# Altium PCB PCBPadometer.PcbDoc
Units mm, origin at the board's own origin, x right, y up, seen from the top; angles counter-clockwise.
Board outline 47.04 x 33.14 mm, 2 copper layers (Top Layer, Bottom Layer); 22 components, 20 nets, 131 pads, 15 vias.
Unrouted connection lines stored in the file: 1.
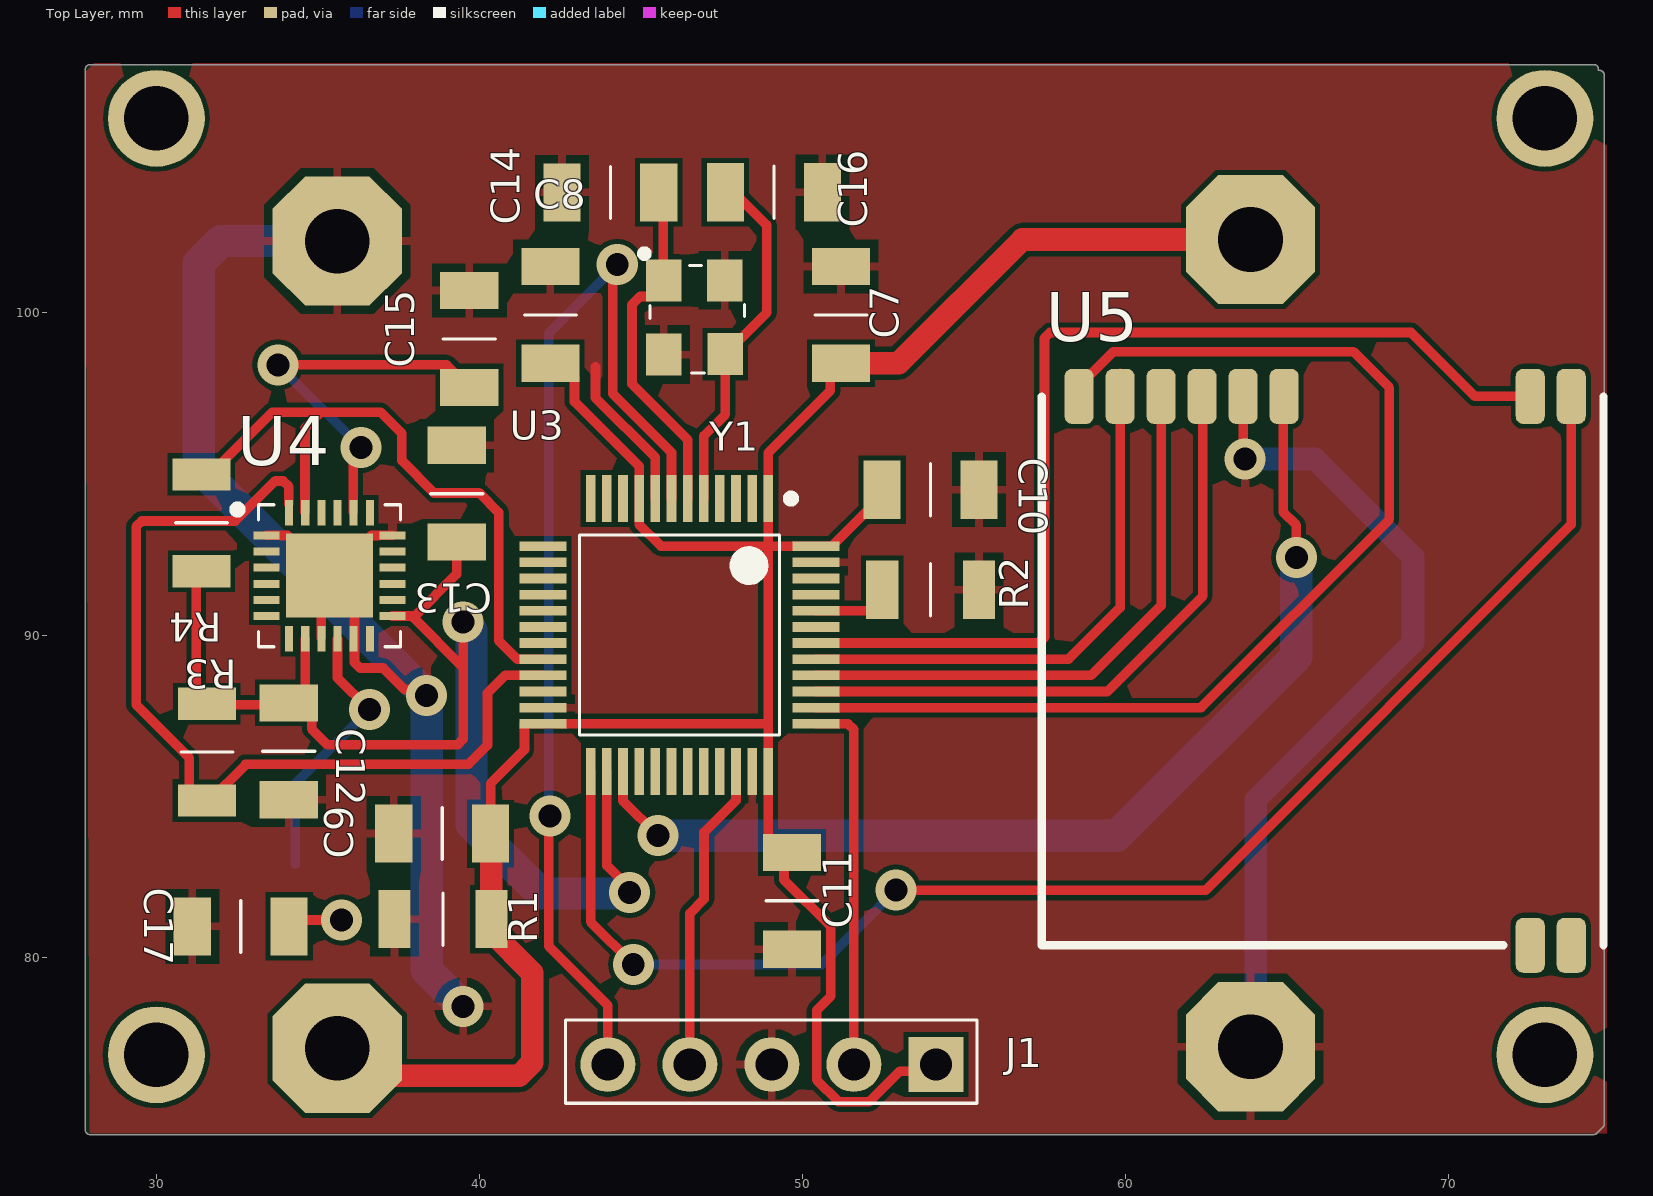
[diagram p0: Top Layer view]
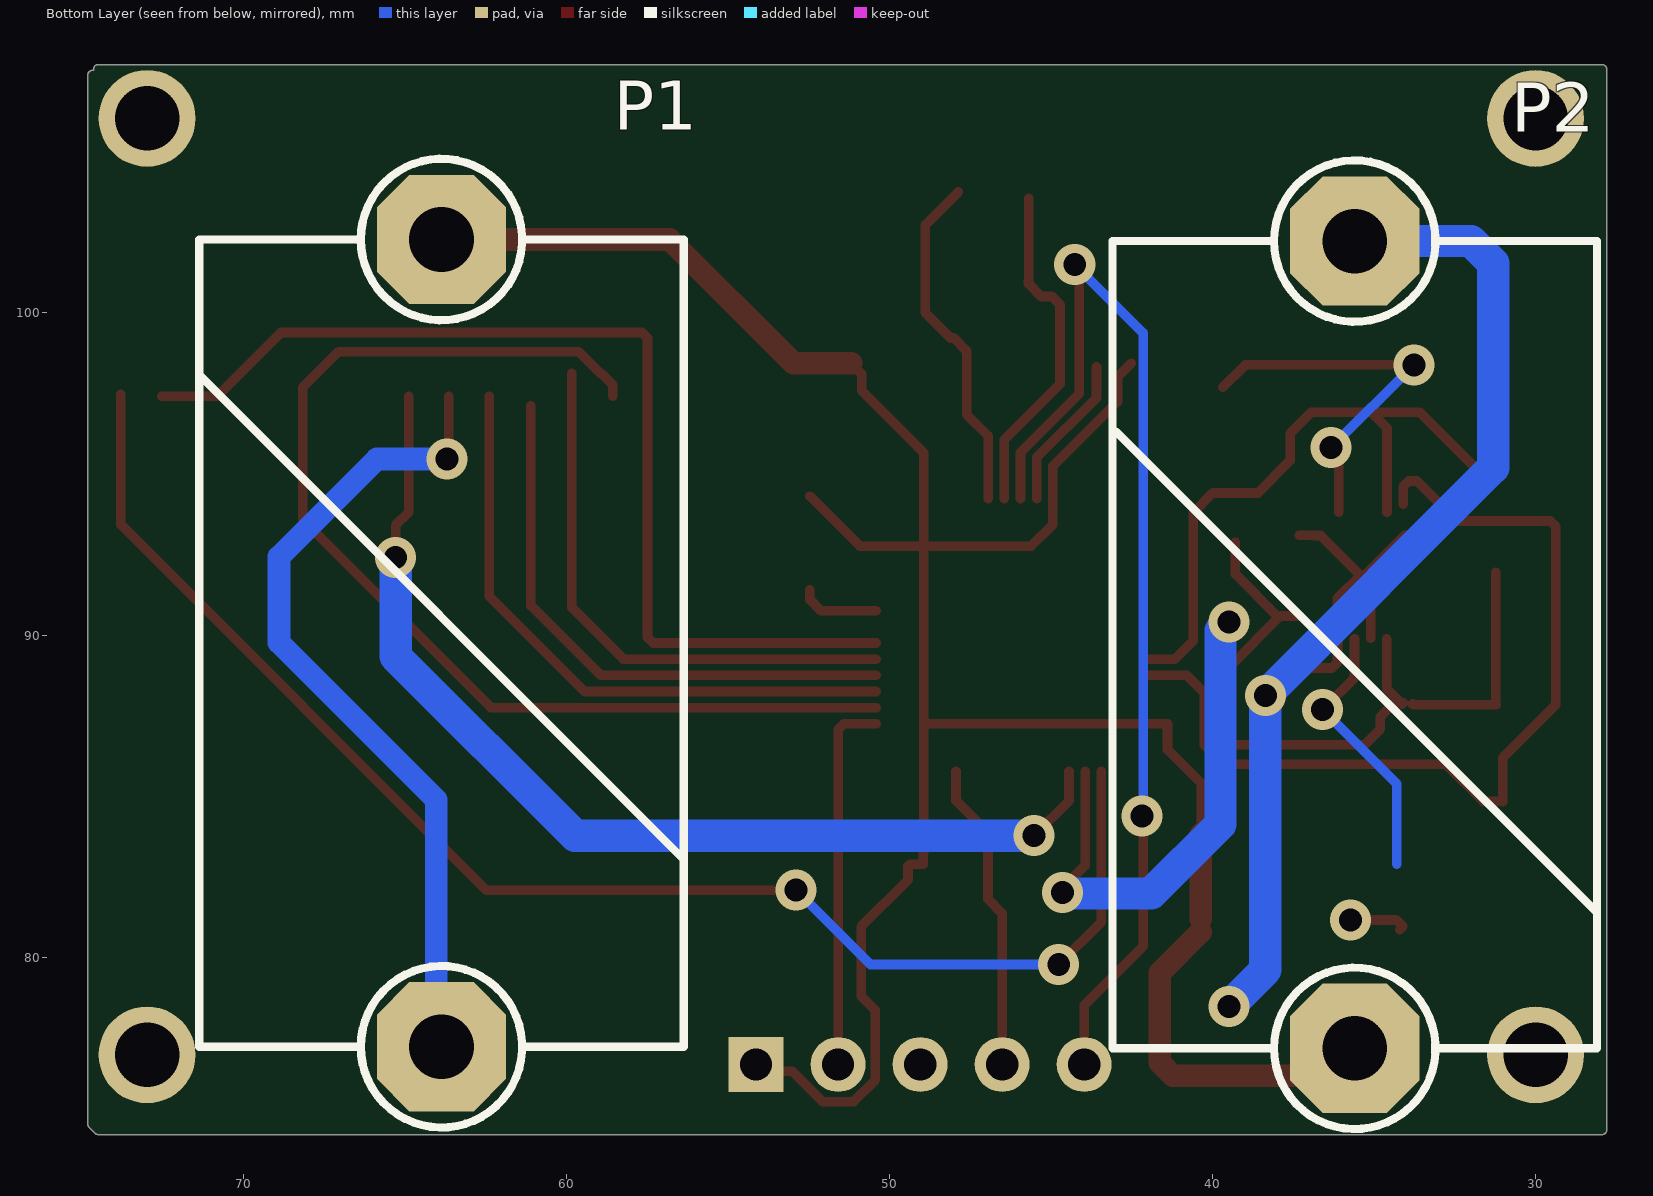
[diagram p1: Bottom Layer view, seen from below]
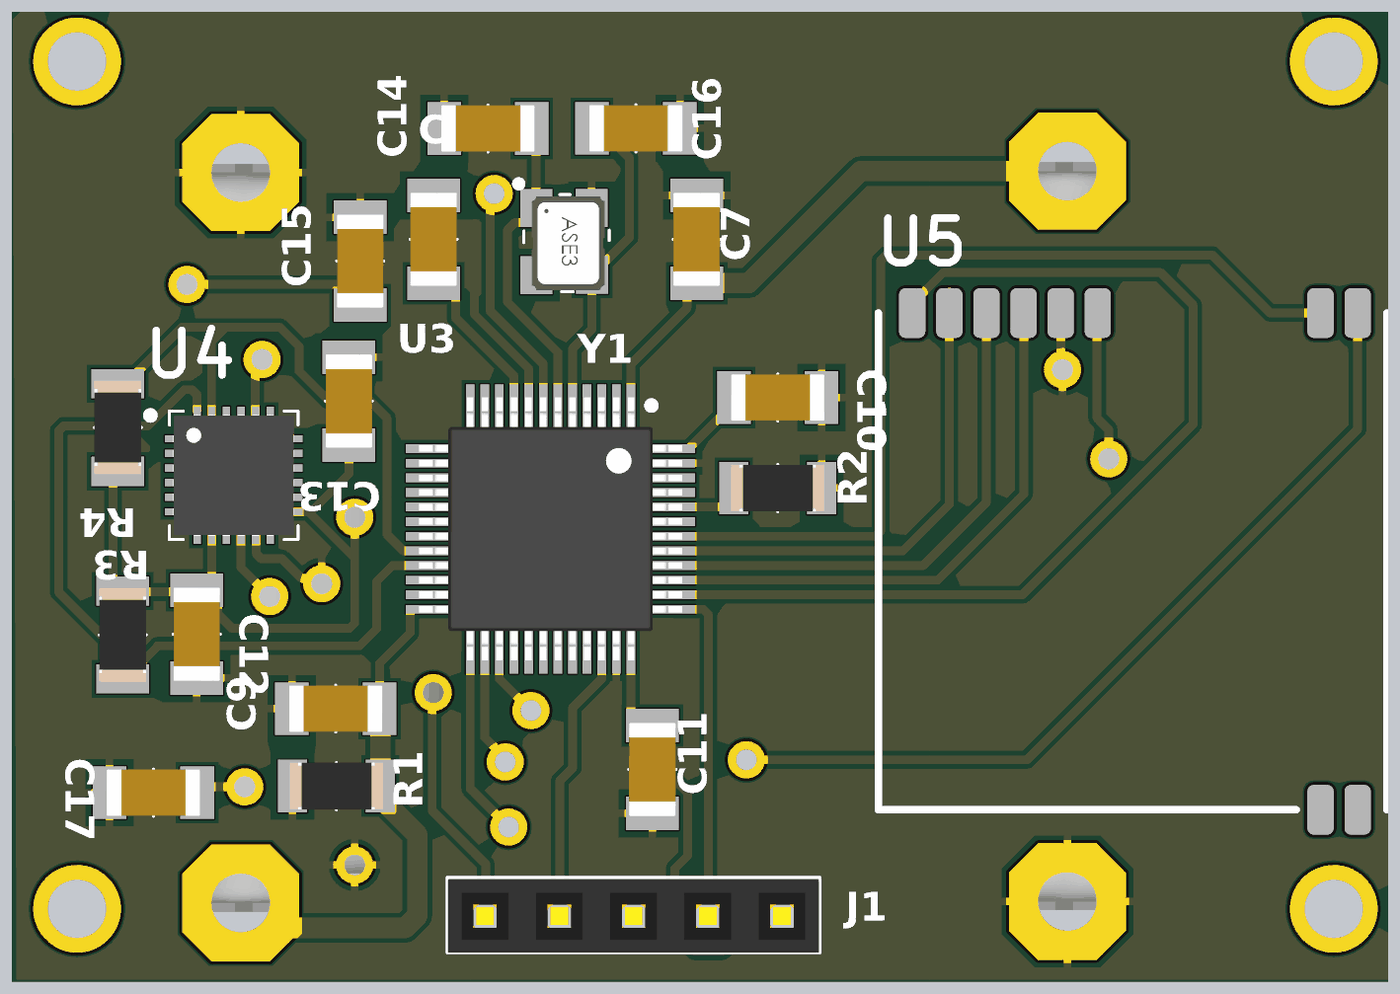
[diagram p2: 3D render of the assembled board from above, using the file's embedded part models]

## Layer stack, top to bottom
Top Solder: solder mask 0.0102, Solder Resist, Dk 3.5
Top Layer: signal copper 0.0356
Dielectric 1: dielectric 0.32, FR-4, Dk 4.8
Bottom Layer: signal copper 0.0356
Bottom Solder: solder mask 0.0102, Solder Resist, Dk 3.5

## Board outline
27.945,74.527 cw(c27.945,74.678) 27.795,74.678 27.795,107.517 cw(c27.945,107.517) 27.945,107.667 74.509,107.667 cw(c74.509,107.517) 74.659,107.517 cw(c74.509,107.517) 74.656,107.489 cw(c74.684,107.341) 74.835,107.341 74.835,74.853 cw(c74.684,74.853) 74.79,74.747 74.791,74.747 74.615,74.571 74.615,74.572 cw(c74.509,74.678) 74.509,74.527

## Design rules (kind name [scope] priority, off if disabled: settings)
Clearance [All] p1: gap=0.254 ignorepadtopadclearanceinfootprint=FALSE except(0.152: Arc-Arc Arc-Track Arc-SMDPad Arc-Poly Track-Track Track-SMDPad Track-THPad Track-Poly SMDPad-SMDPad SMDPad-THPad SMDPad-Poly THPad-Poly Via-Poly Fill-Poly Poly-Poly)
PolygonConnect [All] p1: connectstyle=Relief reliefconductorwidth=0.254 reliefentries=4 polygonreliefangle="90 Angle" airgapwidth=0.254
RoutingVias [All] p1: holewidth=0.711 width=1.27 viastyle="Through Hole" minholewidth=0.711 minwidth=1.27 maxholewidth=0.711 maxwidth=1.27
SolderMaskExpansion [All] p1: expansion=0.102 istentingtop=FALSE
Width [All] p1: maxlimit=1 minlimit=0.254 preferedwidth=0.3 minimp=50.000000 maximp=50.000000 favimp=50.000000
30 further rules are at their usual default settings.

## Components (designator, comment, footprint, x,y, rotation, side; value= is the part's Value field where it differs from the comment)
C7 "0.1 uF C1206" C1206 50.7,99.339 r90 top
C8 "0.1 uF C1206" C1206 41.7,99.339 r90 top
C9 "0.1 uF C1206" C1206 39.425,83.35 r180 top
C10 "0.1 uF C1206" C1206 53.4,95 r0 top
C11 "0.1 uF C1206" C1206 50.185,82.343 r270 top
C12 "0.1 uF C1206" C1206 34.596,86.973 r270 top
C13 "0.1 uF C1206" C1206 38.8,93.8 r90 top
C14 "16 pF" C1206 43.483,104.207 r0 top
C15 "2.2 nF c1206" C1206 39.189,98.593 r90 top
C16 "16 pF" C1206 49.697,103.212 r180 top
C17 "0.1 uF C1206" C1206 32.036,81.476 r0 top
J1 "Header 2.54 1x5" "Header 2.54 1x5" 54.14,76.7 r180 top
P1 "SAFT_LS14250_3.6V" SAFT_LS14250_3.6V 71.382,77.248 r180 bottom
P2 "SAFT_LS14250_3.6V" SAFT_LS14250_3.6V 28.1,102.2 r0 bottom
R1 "10K R1206" "R1206 Resıstor" 38.8,81.2 r0 top
R2 "10K R1206" "R1206 Resıstor" 53.9,91.4 r0 top
R3 "10K R1206" "R1206 Resıstor" 31.562,86.449 r270 top
R4 "10K R1206" "R1206 Resıstor" 31.396,93.398 r90 top
U3 "STM32F101_1" LQFP48-STM 46.2,90 r270 top
U4 "MPU6050_1" QFN50P400X400X90_HS-25N 35.359,91.836 r0 top
U5 "DRF1278F" DRF1278F 73.815,97.39 r270 top
Y1 "8 MHz 12.5 pf Osc" "8 MHZ Osc." 46.2,100 r270 top

## Footprints (in the part's own frame and the unit in brackets; to place one, negate y for a bottom-side part, rotate by r counter-clockwise, add the part's x,y. Pads: shape width x height; smd on the part's side, far side on the other; paste and mask are expansions set on the pad)
"8 MHZ Osc." [mm]
  rect 1.3x1.1 smd mask+0.05: 1(-0.981,-0.49) 2(1.319,-0.49) 3(1.303,1.417) 4(-0.986,1.401)
  silkscreen extent -1.91,-1.19 1.88,2.01, body extent -1.38,-0.64 1.82,1.86, height 1.22
C1206 [mm]
  rect 1.15x1.8 smd mask+0.05: 1(-0.925,-0.5) 2(2.075,-0.5)
  silkscreen extent 0.58,-1.3 0.58,0.31, body extent -1.02,-1.3 2.18,0.3, height 1
DRF1278F [mm]
  rrect50% 1.7x0.9 smd: 1(0,0) 1(0,0) 2(0,-1.27) 8(0,-8.89) 9(0,-10.16) 10(0,-11.43) 11(0,-12.7) 12(0,-13.97) 13(0,-15.24) 14(17,0) 15(17,-1.27)
  silkscreen extent 0,-16.4 17,1
"Header 2.54 1x5" [mm]
  rect 1.7x1.7 hole 1 mask+0.05: 1(0,0)
  round 1.7 hole 1 mask+0.05: 2(2.54,0) 3(5.08,0) 4(7.62,0) 5(10.16,0)
  silkscreen extent -1.28,-1.37 11.48,1.2, body extent -1.25,-1.3 11.45,1.2, height 9.1
LQFP48-STM [mm] "TSQFP, 48-Leads, Body 7,00x7,00mm, Pitch 0,50mm, IPC Medium Density"
  rect 1.45x0.3 smd mask+0.05: 1(-4.225,2.75) 2(-4.225,2.25) 3(-4.225,1.75) 4(-4.225,1.25) 5(-4.225,0.75) 6(-4.225,0.25) 7(-4.225,-0.25) 8(-4.225,-0.75) 9(-4.225,-1.25) 10(-4.225,-1.75) 11(-4.225,-2.25) 12(-4.225,-2.75) 25(4.225,-2.75) 26(4.225,-2.25) 27(4.225,-1.75) 28(4.225,-1.25) 29(4.225,-0.75) 30(4.225,-0.25) 31(4.225,0.25) 32(4.225,0.75) 33(4.225,1.25) 34(4.225,1.75) 35(4.225,2.25) 36(4.225,2.75)
  rect 0.3x1.45 smd mask+0.05: 13(-2.75,-4.225) 14(-2.25,-4.225) 15(-1.75,-4.225) 16(-1.25,-4.225) 17(-0.75,-4.225) 18(-0.25,-4.225) 19(0.25,-4.225) 20(0.75,-4.225) 21(1.25,-4.225) 22(1.75,-4.225) 23(2.25,-4.225) 24(2.75,-4.225) 37(2.75,4.225) 38(2.25,4.225) 39(1.75,4.225) 40(1.25,4.225) 41(0.75,4.225) 42(0.25,4.225) 43(-0.25,4.225) 44(-0.75,4.225) 45(-1.25,4.225) 46(-1.75,4.225) 47(-2.25,4.225) 48(-2.75,4.225)
  silkscreen extent -4.35,-3.1 3.1,3.58, body extent -4.5,-4.5 4.5,4.5, height 1.6
QFN50P400X400X90_HS-25N [mm] "QFN, 24-Leads, Body 4,00x4,00mm, Pitch 0,50mm, Thermal Pad 2,70x2,60mm, IPC Medium Density"
  rect 0.8x0.25 smd mask+0.05: 1(-1.95,1.25) 2(-1.95,0.75) 3(-1.95,0.25) 4(-1.95,-0.25) 5(-1.95,-0.75) 6(-1.95,-1.25) 13(1.95,-1.25) 14(1.95,-0.75) 15(1.95,-0.25) 16(1.95,0.25) 17(1.95,0.75) 18(1.95,1.25)
  rect 0.25x0.8 smd mask+0.05: 7(-1.25,-1.95) 8(-0.75,-1.95) 9(-0.25,-1.95) 10(0.25,-1.95) 11(0.75,-1.95) 12(1.25,-1.95) 19(1.25,1.95) 20(0.75,1.95) 21(0.25,1.95) 22(-0.25,1.95) 23(-0.75,1.95) 24(-1.25,1.95)
  rect 2.7x2.6 smd mask+0.05: 25(0,0)
  silkscreen extent -2.97,-2.2 2.2,2.2, body extent -2.07,-2.07 2.07,2.07, height 0.9
"R1206 Resıstor" [mm]
  rect 1x1.8 smd mask+0.05: 1(-1.425,0) 2(1.575,0)
  silkscreen extent 0.08,-0.8 0.08,0.81, body extent -1.52,-0.8 1.68,0.81, height 0.55
SAFT_LS14250_3.6V [mm]
  oct 4x4 hole 2: 1(7.5,25) 2(7.5,0)
  silkscreen extent 0,-2.5 15,27.5, body extent 0.1,-0.3 15.1,25.3, height 15.5

## Part data
U3: "STM32F101 48 PİNLİ MİKROİŞLEMCİ"
U4: "MPU6050 GYRO"

## Free pads (board coordinates)
  round 3 hole 2: 3(30,77) 3(30,106) 3(73,77) 3(73,106)

## Via types
v1: diameter 1.27, hole 0.711, Top Layer to Bottom Layer, 15 vias

## Nets (pads, with @x,y where several pads share a name; then routed paths per layer and width w, separated by ;. In a path a pad name is that pad's centre, name@x,y a point inside that pad or via, vN(x,y) a via of type N, cw(c..) or ccw(c..) an arc to the next point about the centre after c; other vN are vias at no path point)
"3.3 V": C7.1 C8.1 C9.1 C10.1 C11.1 J1.1 P1.1 P2.1 R1.2 U3.1 U3.9 U3.24 U3.36 U3.48 | length 83.1
  Top Layer w0.3: P2.1@35.617,77.201 P2.1@36.47,76.348 ; R1.2@40.375,80.8 R1.2 ; C9.1@40.375,83.825 C9.1 40.35,85.4 41.4,86.45 41.4,87.25 U3.24 48.95,87.25 ; C8.1@42.525,98.414 42.95,97.989 42.95,97.228 44.95,95.228 44.95,93.423 45.623,92.75 48.95,92.75 ; C7.1 50.87,98.085 50.87,97.565 48.95,95.645 U3.1 48.95,92.75 ; C10.1@52.475,94.3 50.925,92.75 U3.48 48.95,92.75 ; J1.1 53.927,76.487 53.016,76.487 52.077,75.548 51.123,75.548 50.448,76.223 50.448,78.376 50.887,78.815 50.887,80.968 49.436,82.419 49.436,82.843 49.383,82.897 48.958,82.897 48.958,83.242 48.95,83.25 U3.36 48.95,87.25 ; 48.95,87.25 48.95,92.75
  Top Layer w0.7: P2.1@36.47,76.348 41.23,76.348 41.64,76.758 41.64,79.535 R1.2@40.375,80.8 ; R1.2 C9.1@40.375,83.825 ; C7.1 52.985,98.414 56.819,102.248 P1.1
GND: C7.2 C8.2 C9.2 C10.2 C11.2 C12.2 C13.2 C14.1 C15.2 C16.1 C17.1 J1.3 P1.2 P2.2 R1.1 R2.2 U3.8 U3.23 U3.35 U3.47 U4.1 U4.9 U4.11 U4.18 U4.25 U5.9 Y1.2 Y1.4 | length 74.1
  Top Layer w0.3: U4.1 33.857,93.086 33.859,93.084 34.061,93.084 35.295,91.85 U4.25@35.3,91.85 ; U4.9@35.1,89.9 35.1,91.65 U4.25@35.3,91.85 ; U4.18 36.861,93.086 36.859,93.084 36.657,93.084 U4.25@35.423,91.85 ; v1(38.37,88.125) 38.185,88.311 37.689,88.311 37.022,88.978 36.31,88.978 36.134,89.154 36.134,91.139 U4.25@35.423,91.85 ; 43.6,98.3 43.6,97.346 45.45,95.496 U3.8 ; U5.9 63.658,97.387 63.658,95.511 v1(63.718,95.452) ; U4.25@35.3,91.85 U4.25@35.423,91.85
  Bottom Layer w0.7: v1(63.718,95.452) 65.88,95.452 68.914,92.419 68.914,89.767 64.05,84.904 64.05,77.416 P1.2
  Bottom Layer w1: P2.2 32,102.2 31.314,101.514 31.314,95.182 v1(38.37,88.125) 38.37,79.63 v1(39.5,78.5)
NetC12_1: C12.1 C13.1 R3.1 R4.1 U3.26 U4.8 U4.13 | length 40.7
  Top Layer w0.3: R4.1@31.232,91.944 31.232,87.861 31.216,87.845 33.791,87.845 C12.1@33.812,87.866 ; C12.1 34.382,87.898 34.807,87.473 34.807,87.097 35.303,86.6 39.324,86.6 39.5,86.776 39.5,89 ; C12.1@34.137,87.866 34.609,88.338 U4.8 ; U4.13 37.914,90.586 39.5,89 ; 37.956,90.544 39.3,91.888 C13.1 ; v1(39.5,90.4) 39.5,89 ; U3.26 43.95,82.861 44.65,82.161 v1(44.65,82.027)
  Bottom Layer w1: v1(39.5,90.4) 39.759,90.141 39.759,84.139 41.905,81.994 44.617,81.994 v1(44.65,82.027)
NetC14_2: C14.2 U3.6 Y1.1 | length 10.6
  Top Layer w0.3: C14.2@45.7,103.527 45.7,100.992 Y1.1 ; Y1.1@45.71,100.949 45.71,100.881 45.31,100.481 44.981,100.481 44.729,100.229 44.729,97.771 46.45,96.05 46.45,94.888 U3.6
NetC15_1: C15.1 U4.20 | length 11.9
  Top Layer w0.3: v1(33.761,98.368) 38.989,98.368 C15.1 ; U4.20@36.1,93.8 36.1,95.338 36.329,95.566 v1(36.329,95.8)
  Bottom Layer w0.3: v1(33.761,98.368) v1(36.329,95.8)
NetC16_2: C16.2 U3.5 Y1.3 | length 10.8
  Top Layer w0.3: U3.5 46.95,96.165 47.617,96.832 Y1.3 47.617,98.797 48.017,99.197 48.117,99.197 48.9,99.979 48.9,102.7 C16.2@47.874,103.726
NetC17_2: C17.2 U4.10 | length 10.2
  Top Layer w0.3: C17.2@34.211,80.876 C17.2 34.311,81.176 v1(35.736,81.176) ; U4.10 35.609,88.672 v1(36.592,87.689)
  Bottom Layer w0.3: 34.3,82.9 34.3,85.397 v1(36.592,87.689)
NetJ1_2: J1.2 U3.37 | length 11.6
  Top Layer w0.3: U3.37 51.424,87.25 51.6,87.074 J1.2
NetJ1_4: J1.4 U3.34 | length 9.7
  Top Layer w0.3: J1.4 46.52,81.383 46.96,81.823 46.96,83.887 47.95,84.878 U3.34
NetJ1_5: J1.5 U3.7 | length 34.5
  Top Layer w0.3: v1(42.188,84.4) 42.188,84.276 42.152,84.24 42.152,80.36 43.98,78.532 J1.5 ; v1(44.271,101.476) 44.133,101.338 44.133,97.467 45.95,95.65 U3.7
  Bottom Layer w0.3: v1(42.188,84.4) 42.152,84.436 42.152,99.357 v1(44.271,101.476)
NetR2_1: R2.1 U3.44 | length 2.5
  Top Layer w0.3: U3.44 52.125,90.75 52.475,91.1 R2.1
NetR3_2: R3.2 U3.21 U4.24 | length 28.5
  Top Layer w0.3: R3.2@31.016,84.836 31.016,86.2 29.371,87.846 29.371,93.354 29.546,93.53 32.437,93.53 33.676,94.769 33.924,94.769 34.1,94.593 U4.24@34.1,94.05 ; R3.2@31.216,84.845 31.616,84.845 32.753,85.981 32.753,86 39.663,86 40.252,86.589 40.252,88.202 40.8,88.75 U3.21
NetR4_2: R4.2 U3.20 U4.23 | length 20.8
  Top Layer w0.3: R4.2@31.232,94.944 31.632,94.944 33.589,96.9 35.095,96.9 ; U4.23@34.6,93.8 34.6,96.405 35.095,96.9 ; U3.20 41.173,89.25 40.6,89.823 40.6,93.8 40,94.4 38.598,94.4 37.6,95.398 37.6,96.239 36.939,96.9 35.095,96.9
NetU3_25: U3.25 U5.1 | length 45.2
  Top Layer w0.3: U3.25 43.45,81.115 v1(44.767,79.798) ; v1(52.9,82.1) 62.5,82.1 73.815,93.415 U5.1@73.815,97.454
  Bottom Layer w0.3: v1(44.767,79.798) 50.598,79.798 v1(52.9,82.1)
NetU3_27: U3.27 U5.8 | length 32.7
  Top Layer w0.3: U3.27 44.45,84.866 v1(45.53,83.786) ; U5.8@64.9,97.39 64.9,93.8 65.3,93.4 v1(65.3,92.4)
  Bottom Layer w1: v1(45.53,83.786) 59.745,83.786 65.3,89.341 v1(65.3,92.4)
NetU3_38: U3.38 U5.13 | length 35.1
  Top Layer w0.3: U3.38 62.35,87.75 68.184,93.584 68.184,97.66 67.068,98.776 59.635,98.776 58.95,98.09 58.916,98.09 58.575,97.75 U5.13
NetU3_39: U3.39 U5.10 | length 19.4
  Top Layer w0.3: U3.39 59.45,88.25 62.4,91.2 U5.10@62.4,97.39
NetU3_40: U3.40 U5.11 | length 17.8
  Top Layer w0.3: U3.40 58.95,88.75 61.115,90.915 U5.11@61.115,97.089
NetU3_41: U3.41 U5.12 | length 17.3
  Top Layer w0.3: U3.41 58.25,89.25 59.845,90.845 U5.12@59.845,98.107
NetU3_42: U3.42 U5.2 | length 32.3
  Top Layer w0.3: U3.42 57.324,89.75 57.5,89.926 57.5,99.191 57.676,99.367 68.853,99.367 70.83,97.39 U5.2
pads on no net: U3.2 U3.3 U3.4 U3.10 U3.11 U3.12 U3.13 U3.14 U3.15 U3.16 U3.17 U3.18 U3.19 U3.22 U3.28 U3.29 U3.30 U3.31 U3.32 U3.33 U3.43 U3.45 U3.46 U4.2 U4.3 U4.4 U4.5 U4.6 U4.7 U4.12 U4.14 U4.15 U4.16 U4.17 U4.19 U4.21 U4.22 U5.14 U5.15

## Polygon pours and split planes (outlines as drawn)
GND on Top Layer "GND_L01_P002" (solid, pour order 2): 27.794,107.707 74.904,107.707 74.916,107.719 74.916,74.568 27.976,74.568 27.928,74.52
no net on Top Layer "NONET_L01_P000" (solid, pour order 0): 27.794,107.707